# Altium PCB LT5512.PcbDoc
Units mil, origin at the board's own origin, x right, y up, seen from the top; angles counter-clockwise.
Board outline 1422 x 893 mil, 4 copper layers (Top Layer, Layer 1, Layer 2, Bottom Layer), stack 23.756 mil thick; 21 components, 14 nets, 78 pads, 99 vias.
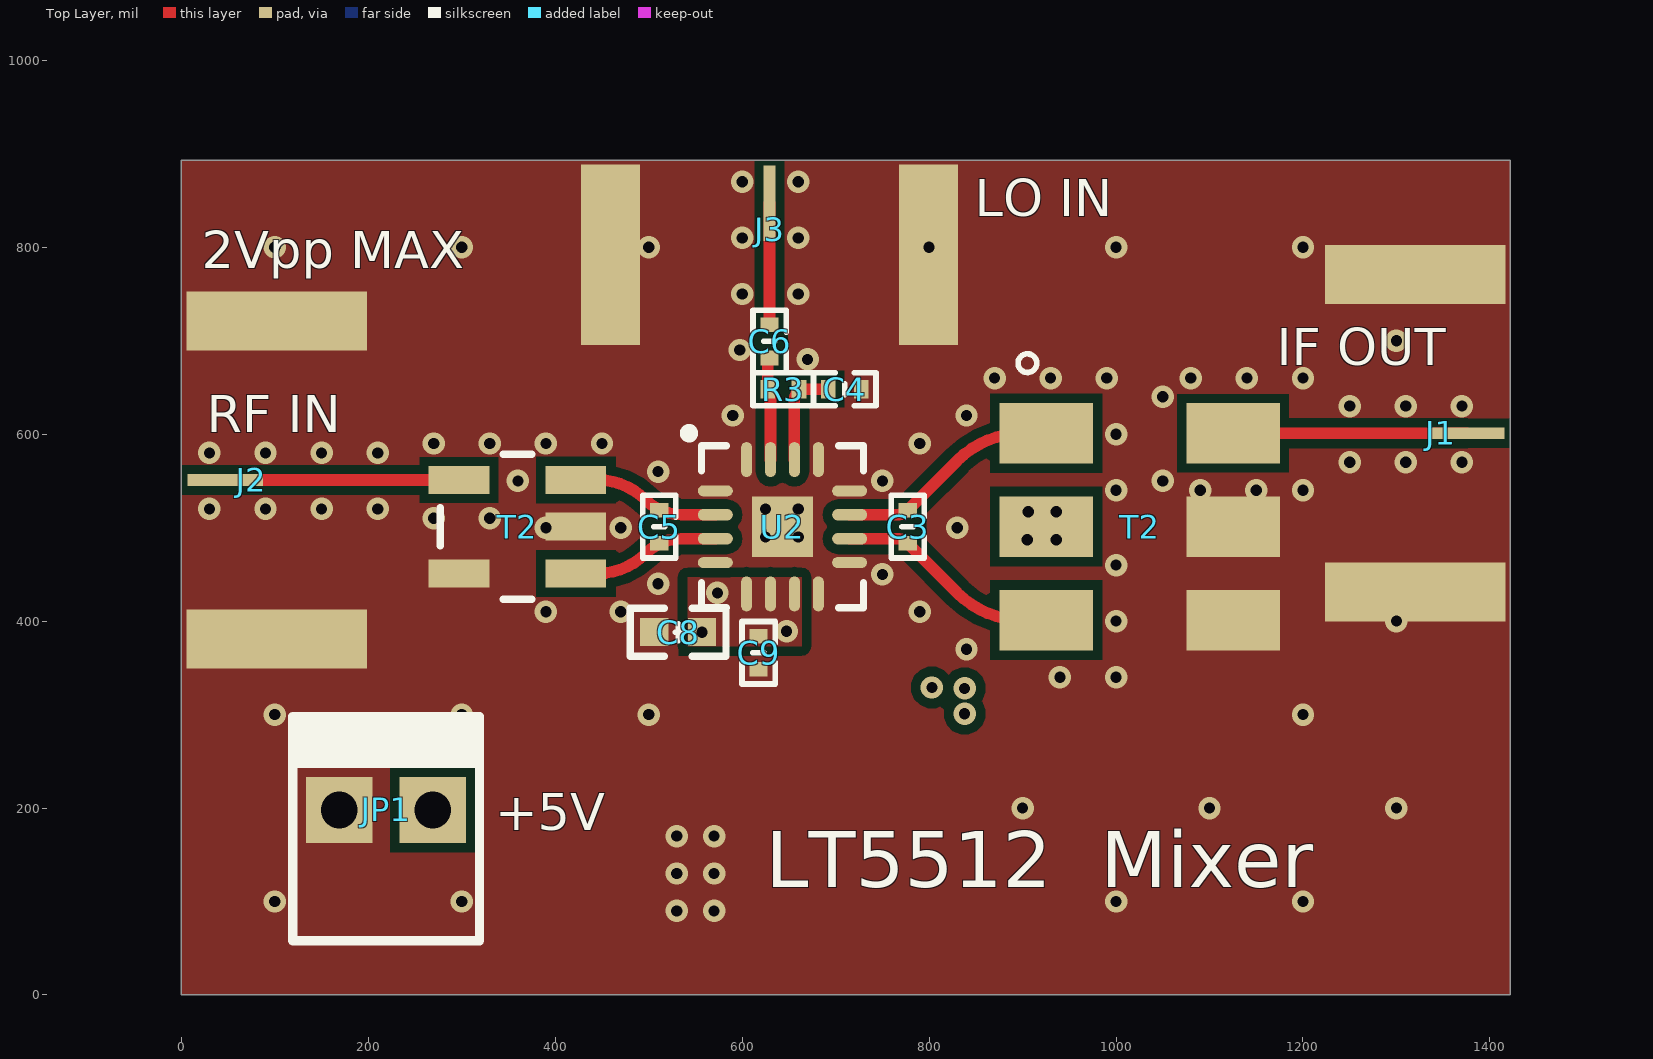
[diagram p0: Top Layer view]
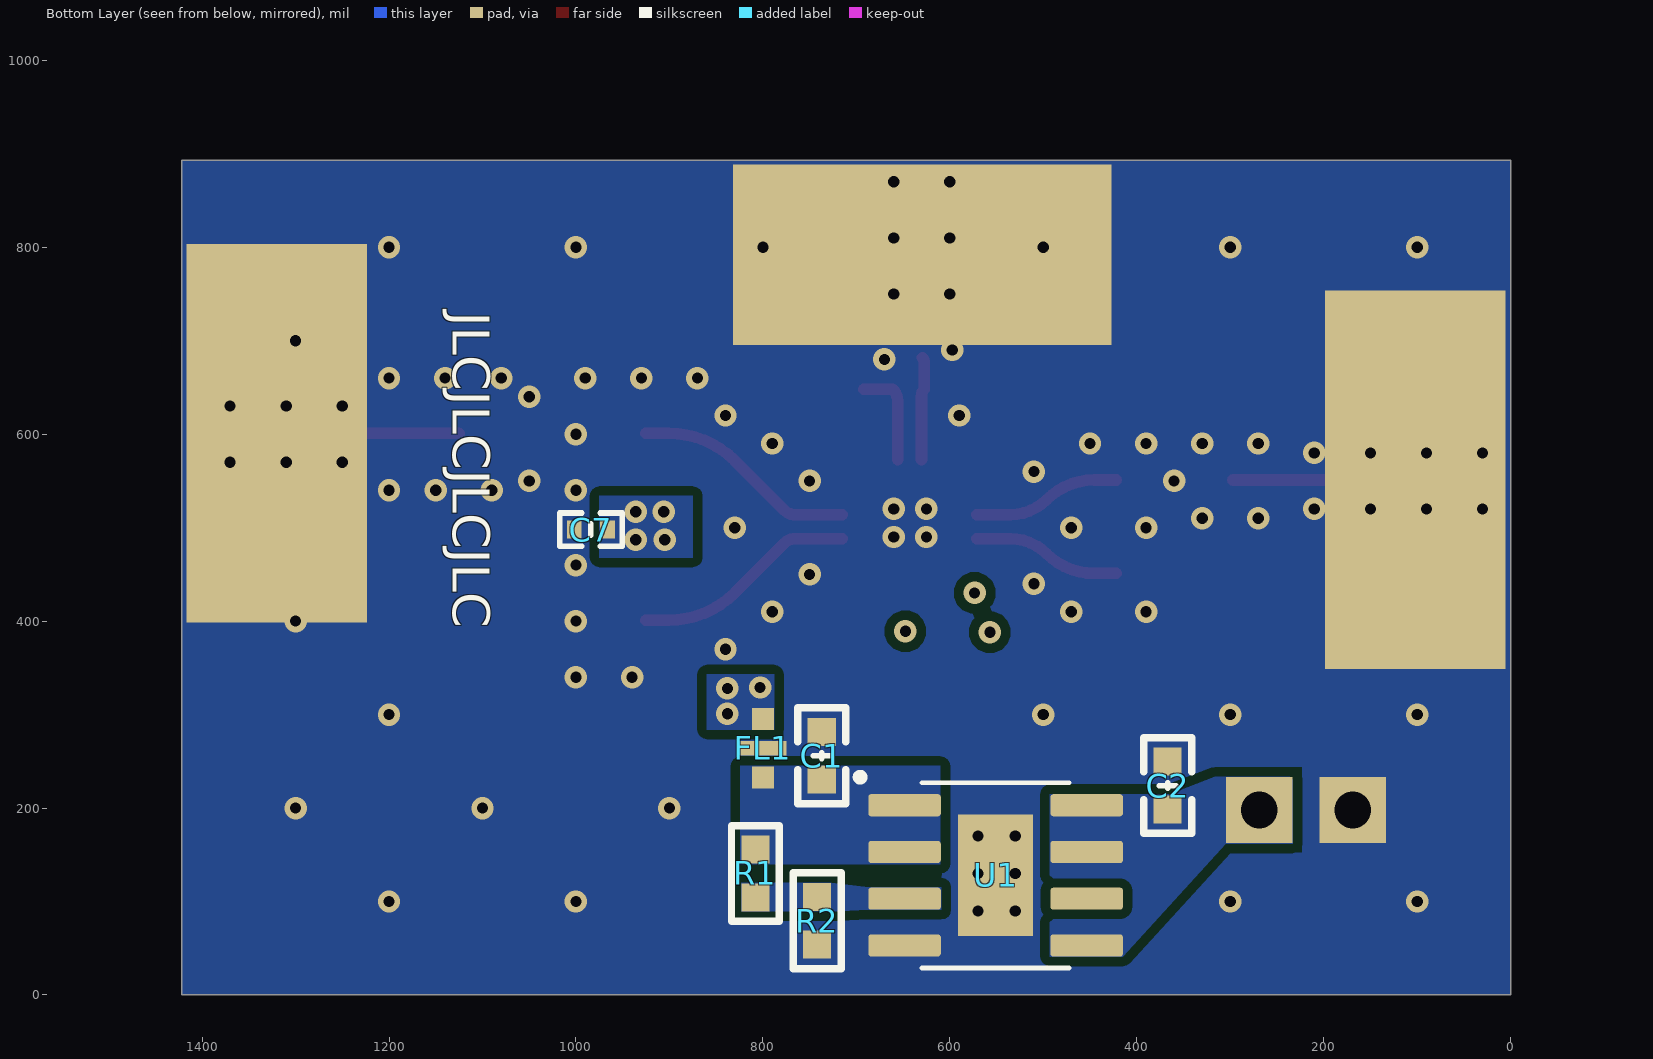
[diagram p1: Bottom Layer view, seen from below]
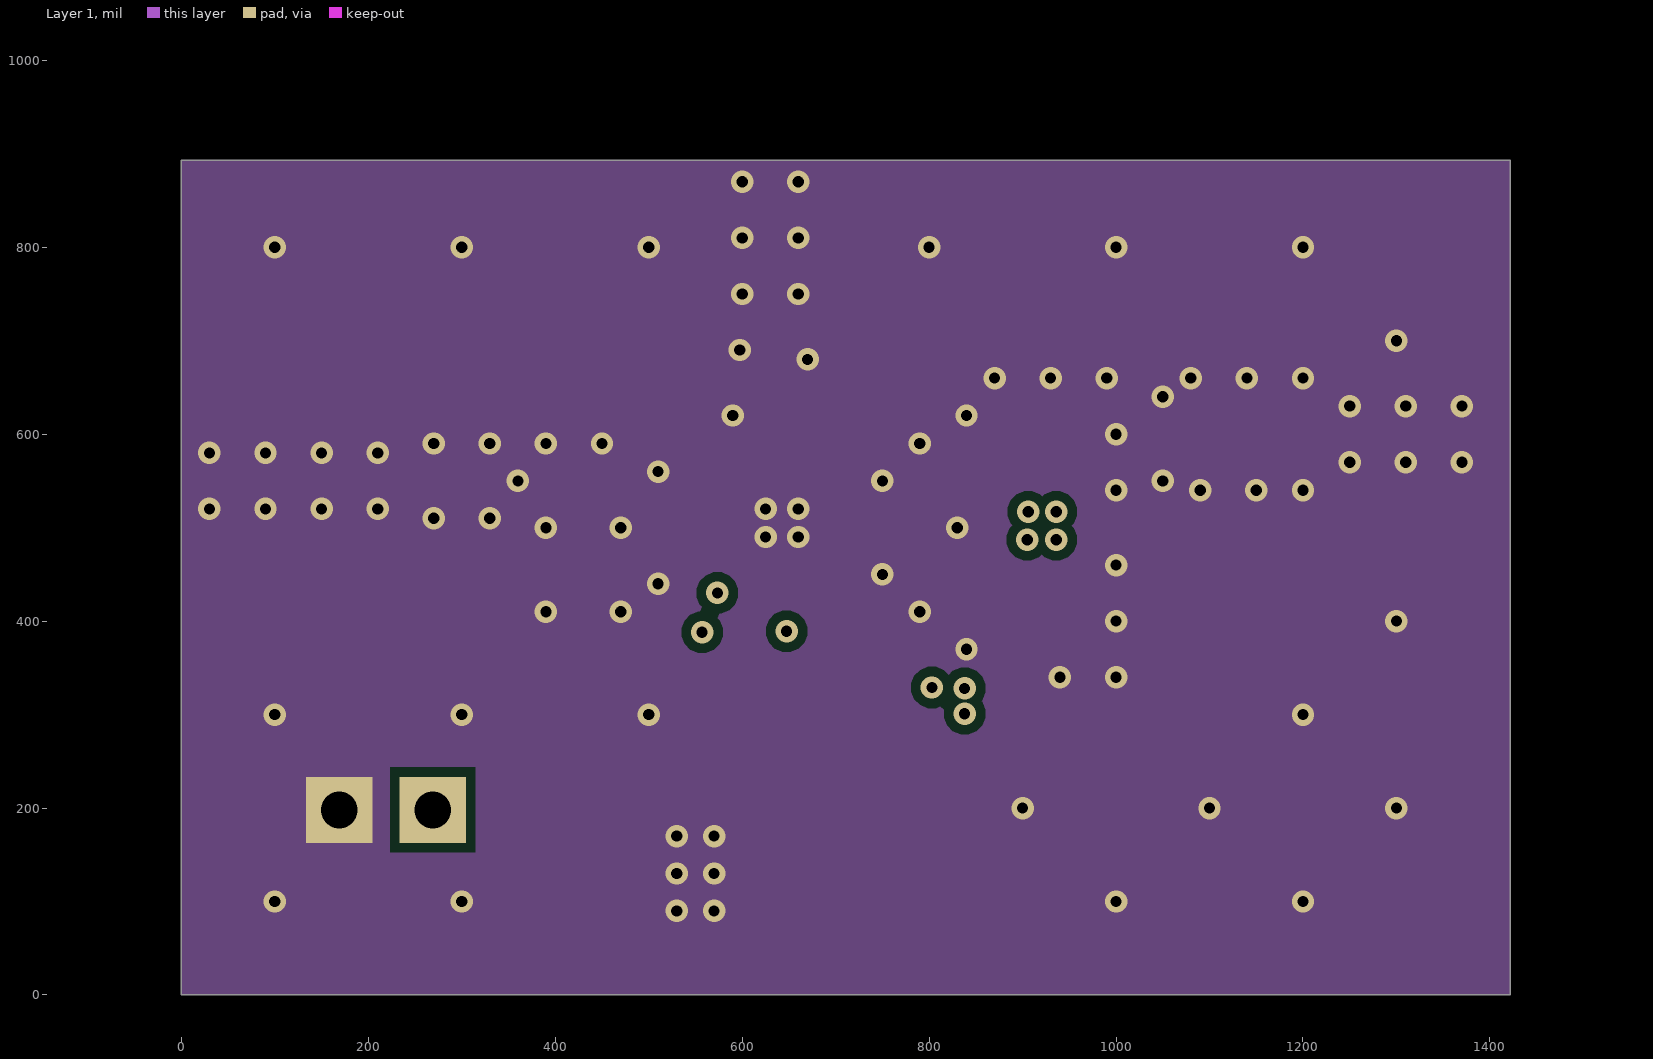
[diagram p2: Layer 1]
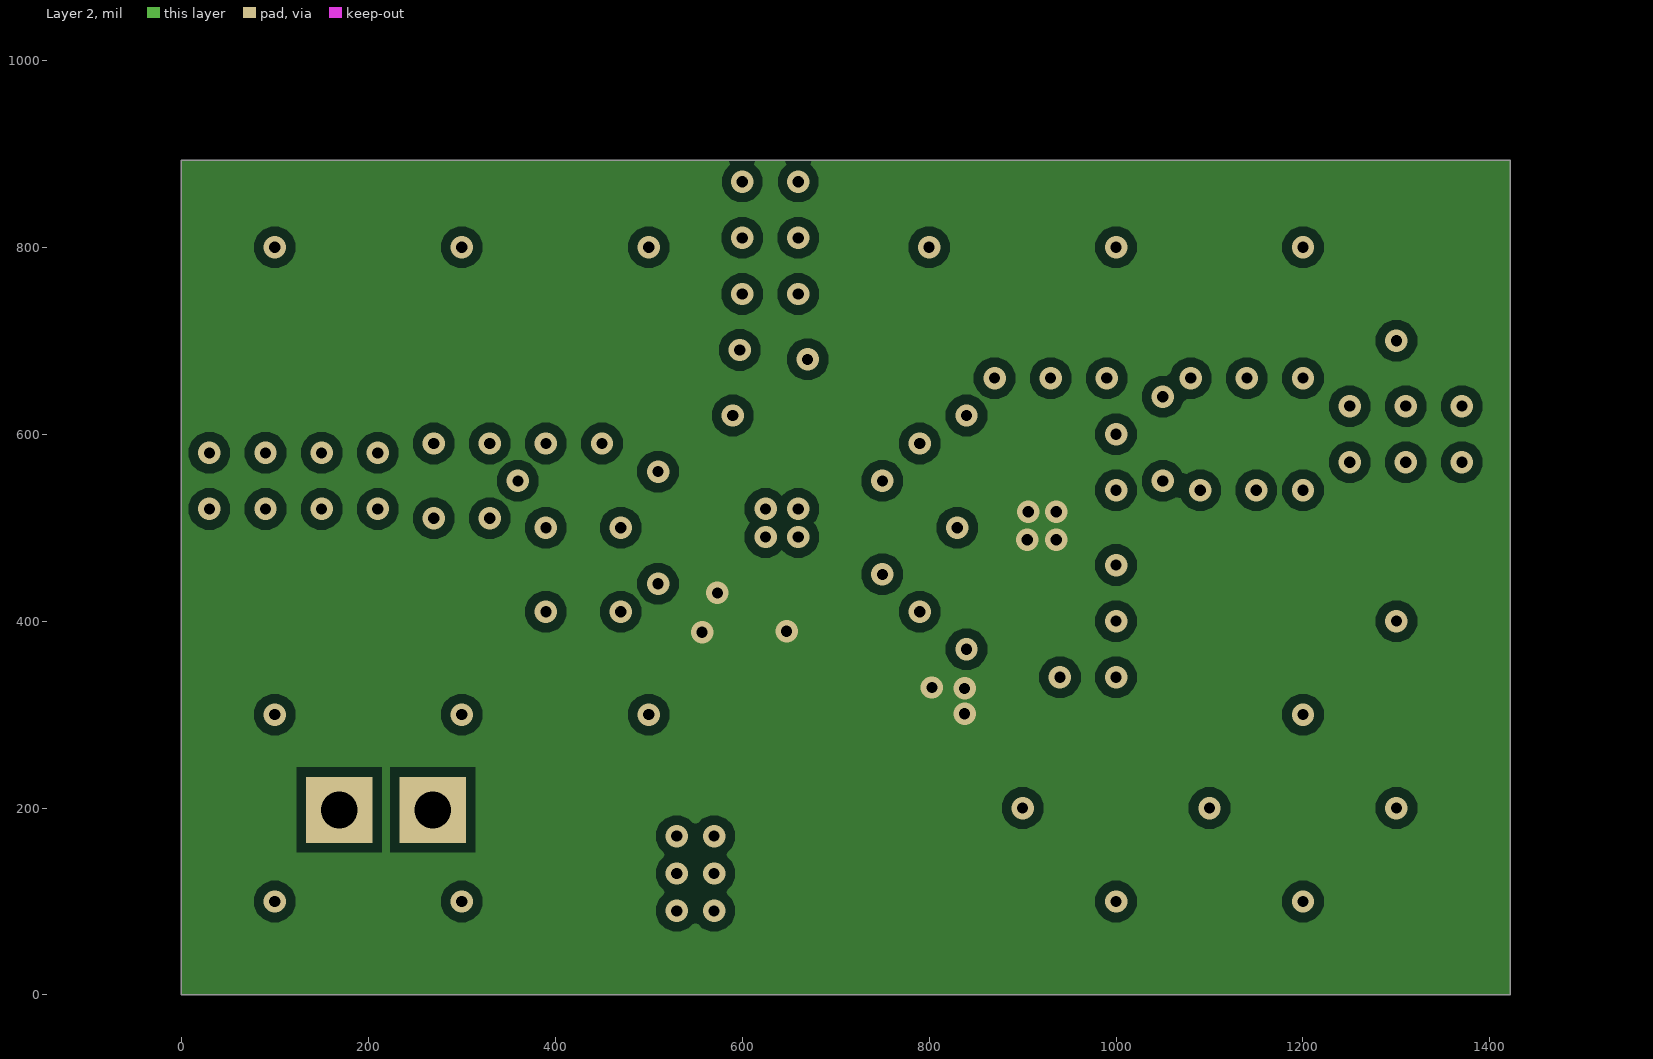
[diagram p3: Layer 2]
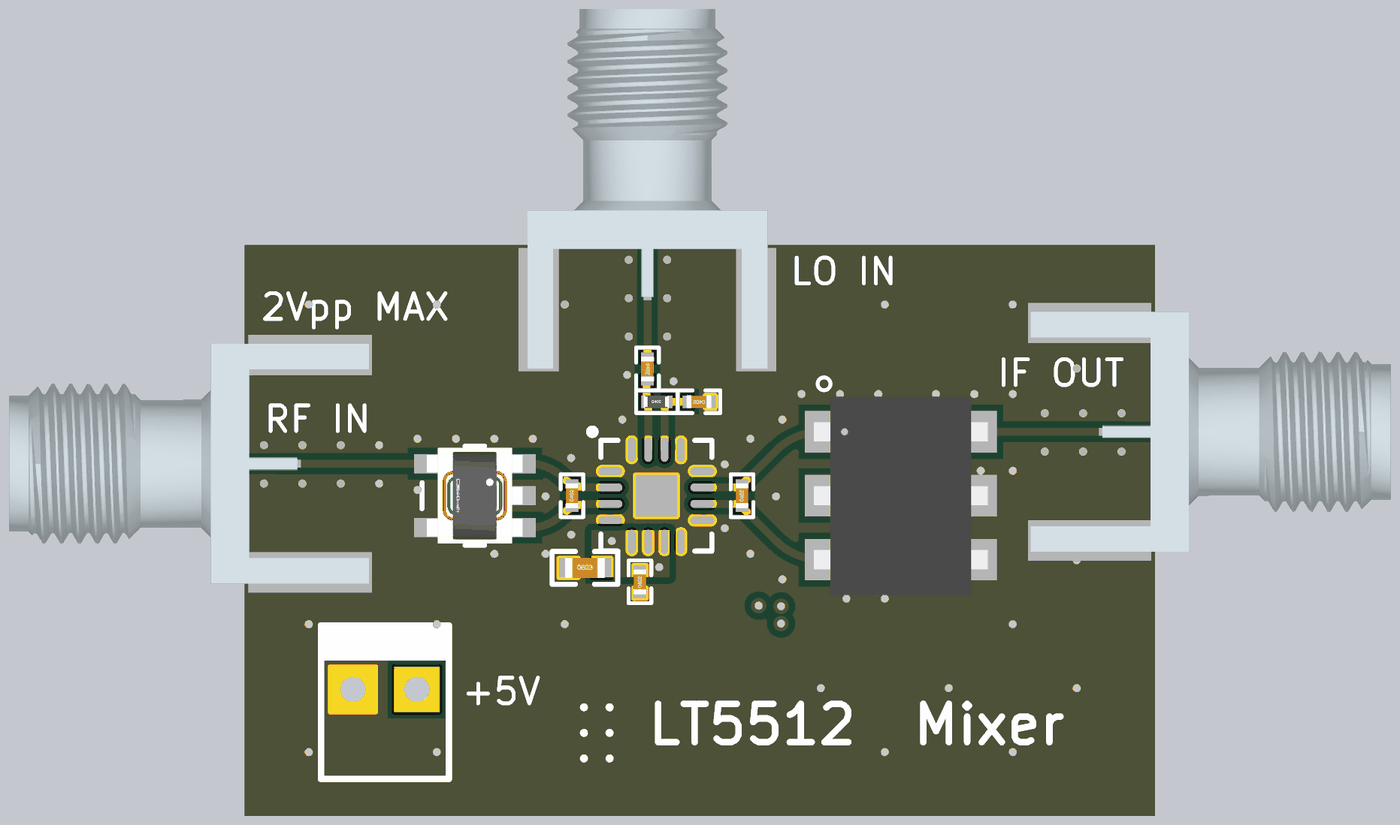
[diagram p4: 3D render of the assembled board from above, using the file's embedded part models]
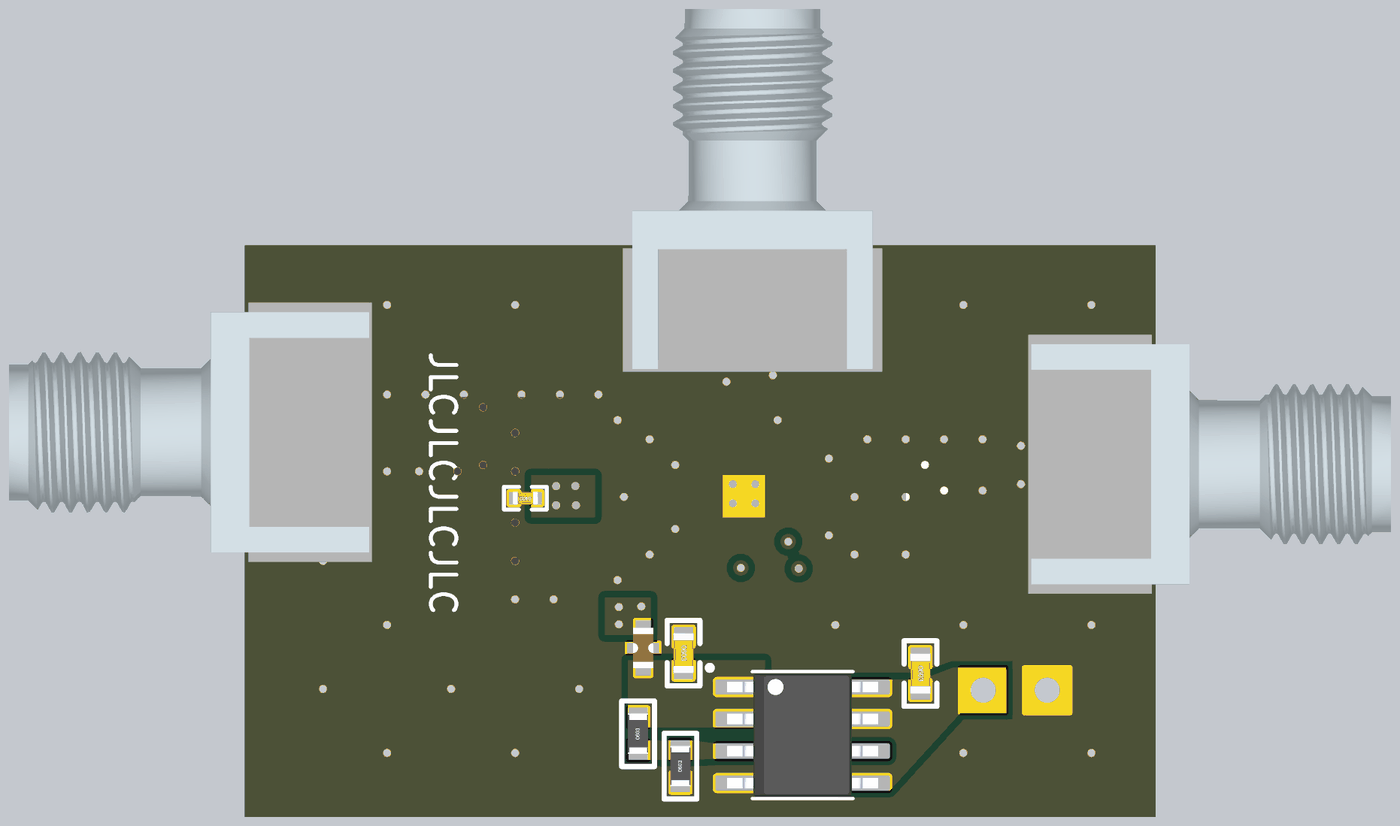
[diagram p5: 3D render of the assembled board from below, using the file's embedded part models]

## Layer stack, top to bottom
Top Solder: solder mask 0.4, Solder Resist, Dk 3.5
Top Layer: signal copper 1.4
Dielectric 2: prepreg 2.8, PP-006, Dk 4.1
Layer 1: signal copper 1.378
Dielectric 1: dielectric 12.6, FR-4, Dk 4.8
Layer 2: signal copper 1.378
Dielectric 3: prepreg 2.8, PP-006, Dk 4.1
Bottom Layer: signal copper 1.4
Bottom Solder: solder mask 0.4, Solder Resist, Dk 3.5

## Board outline
0,0 1422,0 1422,893 0,893

## Design rules (kind name [scope] priority, off if disabled: settings)
Clearance [All] p1: gap=10 ignorepadtopadclearanceinfootprint=TRUE
PlaneConnect [All] p1: planeconnectstyle=Direct reliefexpansion=20 reliefentries=4 reliefconductorwidth=10 reliefairgap=10
PolygonConnect [All] p1: connectstyle=Direct reliefconductorwidth=10 reliefentries=4 polygonreliefangle="90 Angle" airgapwidth=10
RoutingVias [All] p1: holewidth=28 width=50 viastyle="Through Hole" minholewidth=28 minwidth=50 maxholewidth=28 maxwidth=50
SolderMaskExpansion [All] p1: expansion=4 istentingtop=FALSE
Width [All] p1: maxlimit=20 minlimit=9 preferedwidth=10
29 further rules are at their usual default settings.

## Components (designator, comment, footprint, x,y, rotation, side; value= is the part's Value field where it differs from the comment)
C1 "4.7uF" "C 0603_L" 737,256 r270 bottom
C2 "2.2uF" "C 0603_L" 367,224 r270 bottom
C3 "1.8pF" "C 0402_L" 777,501 r90 top
C4 "10nF" "C 0402_L" 709.71,648 r180 top
C5 "39pF" "C 0402_L" 511.3,501 r90 top
C6 "10nF" "C 0402_L" 629.26,699.29 r270 top
C7 "100nF" "C 0402_L" 984,498 r0 bottom
C8 "1uF" "C 0603_L" 531.5,388.15 r0 top
C9 "10nF" "C 0402_L" 617.5,366.15 r90 top
FL1 "NFM18CC223R1C3D" FIL_NFM18CC223R1C3D 800,264 r90 bottom
J1 "132414" CONN_132414_AMP 1520.15,601 r270 top
J2 "132414" CONN_132414_AMP -98,551 r90 top
J3 "132414" CONN_132414_AMP 629.26,992.01 r0 top
JP1 "HDR-1X2" KF2510-LI-2P 219,198 r0 top
R1 "51K" "R 0603_L" 808,130 r90 bottom
R2 "10K" "R 0603_L" 741.87,79.39 r90 bottom
R3 "100" "R 0402_L" 643.11,647.99 r0 top
T2 "ADT8-1T+" ADT8-1T+ 1030.15,506 r0 top (schematic designator T?)
T2 "TC1-1T" FP-TC1-1-13M+-MFG 359.5,501 r270 top
U1 "MP20051DQ-LF-Z" SOIC127P600X170-9N 551,128 r180 bottom
U2 "LT5512EUF#PBF" LT-UF-16_L 643.11,501 r0 top (schematic designator U?)

## Footprints (in the part's own frame and the unit in brackets; to place one, negate y for a bottom-side part, rotate by r counter-clockwise, add the part's x,y. Pads: shape width x height; smd on the part's side, far side on the other; paste and mask are expansions set on the pad)
ADT8-1T+ [mil]
  rect 100x65 smd mask+0: 1(-105,95) 2(-105,-5) 3(-105,-105) 4(95,-105) 5(95,-5) 6(95,95)
  silkscreen extent -135,160 -115,180, body extent -141,-160 131,150, height 206
"C 0402_L" [mm] "无极性贴片电容"
  rect 0.4x0.5 smd: 1(-0.45,0) 2(0.45,0)
  silkscreen extent -0.85,-0.45 0.85,0.45, body extent -0.5,-0.26 0.5,0.26, height 0.53
"C 0603_L" [mil] "无极性贴片电容"
  rect 30x30 smd: 1(-25.59,0) 2(25.59,0)
  silkscreen extent -51,-26 51,26, body extent -31,-16 31,16, height 32
CONN_132414_AMP [mil]
  rect 12.36x81 smd paste+0 mask+0: 1(0,-145)
  rect 63x193 smd mask+0: 2(-170,-200) 3(170,-200)
  rect 405x193 smd far side mask+0: 4(0,-200)
  body extent -188,-292 188,270, height 162
FIL_NFM18CC223R1C3D [mm]
  rect 0.6x0.6 smd: 1(-0.8,0) 3(0.8,0)
  rect 0.4x1.27 smd: 2(0,0)
  body extent -0.8,-0.4 0.8,0.4, height 0.7
FP-TC1-1-13M+-MFG [mil]
  rect 30x65 smd paste+0 mask+0: 1(-50,62.5) 2(0,62.5) 3(50,62.5) 4(50,-62.5) 6(-50,-62.5)
  silkscreen extent -78,-83 78,15, body extent -81,-99 81,99, height 10
KF2510-LI-2P [mm] "接插件/2A"
  rect 1.8x1.8 hole 1: 1(-1.27,0) 2(1.27,0)
  silkscreen extent -2.59,-3.56 2.54,2.54, body extent -2.54,-3.5 2.54,2.4, height 11.05
LT-UF-16_L [mm] "QFN, 16-Leads, Body 4.1x4.1mm, Pitch 0.65mm, Thermal Pad 2.15x2.15mm, IPC High Density"
  oval 0.95x0.3 smd: 1(-1.825,0.975) 4(-1.825,-0.975) 9(1.825,-0.975) 12(1.825,0.975)
  oval 0.95x0.314 smd: 2(-1.825,0.325) 3(-1.825,-0.325) 10(1.825,-0.325) 11(1.825,0.325)
  oval 0.3x0.95 smd: 5(-0.975,-1.825) 6(-0.325,-1.825) 7(0.325,-1.825) 8(0.975,-1.825) 13(0.975,1.825) 14(0.325,1.825) 15(-0.325,1.825) 16(-0.975,1.825)
  rect 1.651x1.651 smd: 17(0,0)
  silkscreen extent -2.66,-2.2 2.2,2.66, body extent -2.05,-2.05 2.05,2.05, height 0.8
"R 0402_L" [mm] "1/16W贴片电阻 https://item.taobao.com/item.htm?ft=t&id=613637044352"
  rect 0.4x0.5 smd: 1(-0.4,0) 2(0.45,0)
  silkscreen extent -0.8,-0.45 0.85,0.45, body extent -0.5,-0.25 0.5,0.25, height 0.3
"R 0603_L" [mil] "1/10W贴片电阻 https://item.taobao.com/item.htm?ft=t&id=613637044352"
  rect 30x30 smd: 1(-25.59,0) 2(25.59,0)
  silkscreen extent -51,-26 51,26, body extent -31,-16 31,16, height 16
SOIC127P600X170-9N [mm]
  rrect25% 1.97x0.6 smd: 1(-2.475,1.905) 2(-2.475,0.635) 3(-2.475,-0.635) 4(-2.475,-1.905) 5(2.475,-1.905) 6(2.475,-0.635) 7(2.475,0.635) 8(2.475,1.905)
  rect 2.032x3.3 smd paste-3: 9(0,0)
  silkscreen extent -3.78,-2.52 2,2.77, body extent -3,-2.45 3,2.45, height 1.7

## Part data
C1 C2 C3 C4 C5 C6 C7 C8 C9: library part C, "贴片电容", BOM名称=贴片电容, 下单链接=https://item.taobao.com/item.htm?ft=t&id=613637044352, 淘宝ID=小糖豆的小窝窝
FL1: "SMD Capacitor with Capacitance: 22000pF Tol. 20%. Rated Voltage: 16Vdc", Package=NONSTANDARD, Availability="In Stock", Check_prices=https://www.snapeda.com/parts/NFM18CC223R1C3D/Murata/view-part/?ref=eda, MF=Murata, MP=NFM18CC223R1C3D, Price=None, Purchase-URL=https://pricing.snapeda.com/search/part/NFM18CC223R1C3D/?ref=eda, SnapEDA_Link=https://www.snapeda.com/parts/NFM18CC223R1C3D/Murata/view-part/?ref=snap
J1 J2 J3: "No Description Available", Mfr_Name="Amphenol ICC", Copyright="Copyright (C) 2022 Ultra Librarian. All rights reserved.", Manufacturer_Part_Number=132414, RefDes=RefDes, Type=DEV
JP1: library part "Header 2", "2P接插件", BOM名称=2P接插件, 下单链接=https://item.taobao.com/item.htm?ft=t&id=613637044352, 淘宝ID=小糖豆的小窝窝
R1 R2 R3: library part R, "贴片电阻", BOM名称=贴片电阻, 下单链接=https://item.taobao.com/item.htm?ft=t&id=613637044352, 淘宝ID=小糖豆的小窝窝
T2: library part CMP-00025-00008-6, "RF Transformer, 50 ohm, 8.0: 1, 0.10-130 MHz, SMT", RoHS Compliant=Yes
T2: library part CMP-00025-00004-3, "RF Transformer 1: 1 5 Terminal SMD", RoHS Compliant=No
U1: "Low Noise, High PSRR, 1A Linear Regulator"
U2: library part LT5512EUF, "High Signal Level Active Mixer, 4.5 to 5.25 V, -40 to 85 degC, 16-Pin QFN (UF), RoHS, Tube", Frequency="1000 Hz", Generic Part Number=LT5512, Supply Voltage Max="5.25 V", Supply Voltage Min="4.5 V", Temperature Max="85 degC", Temperature Min="-40 degC", Code_JEDEC=MO-220, ComponentLink1Description="Manufacturer URL", ComponentLink1URL=http://www.linear.com/, ComponentLink2Description=Datasheet, ComponentLink2URL=http://cds.linear.com/docs/en/datasheet/5512fa.pdf, ComponentLink3Description="Package Specification", ComponentLink3URL=http://cds.linear.com/docs/en/packaging/QFN_16_05-08-1692.pdf, DatasheetVersion="Rev. A", Mounting Technology="Surface Mount", PackageDescription="16-Pin Plastic Quad Flat No-lead Package, Body 4 x 4 mm, Pitch 0.65 mm", PackageVersion=06/2010, Packing=Tube, PartNumber=LT5512EUF#PBF, RoHS=TRUE

## Via types
v1: diameter 24, hole 12, Top Layer to Bottom Layer, tented both sides, 99 vias

## Nets (pads, with @x,y where several pads share a name; then routed paths per layer and width w, separated by ;. In a path a pad name is that pad's centre, name@x,y a point inside that pad or via, vN(x,y) a via of type N, cw(c..) or ccw(c..) an arc to the next point about the centre after c; other vN are vias at no path point)
+4.88V: C7.1 C8.2 C9.2 FL1.3 T2.2@925.15,501 U2.5 U2.6 U2.7
  other v1: 838,301 838,328 803,329 557.09,388.15 647.5,389.15 573.5,430.15 905,487 936,487 906,517 936,517
+4.88V_RAW: C1.2 FL1.1 R1.2 U1.1 U1.2
+5: C2.2 JP1.2 U1.5 U1.7 U1.8
GND: C1.1 C2.1 C4.1 C7.2 C8.1 C9.1 FL1.2 J1.2 J1.3 J1.4 J2.2 J2.3 J2.4 J3.2 J3.3 J3.4 JP1.1 R2.1 T2.2@422,501 T2.4 T2.5 U1.4 U1.9 U2.1 U2.4 U2.8 U2.9 U2.12 U2.13 U2.16 U2.17
  other v1: 530,90 570,90 100,100 300,100 1000,100 1200,100 530,130 570,130 530,170 570,170 900,200 1100,200 1300,200 100,300 300,300 500,300 1200,300 940,340 1000,340 840,370 1000,400 1300,400 390,410 470,410 790,410 510,440 750,450 1000,460 625,490 660,490 390,500 470,500 830,500 270,510 330,510 30,520 90,520 150,520 210,520 625,520 660,520 1000,540 1090,540 1150,540 1200,540 360,550 750,550 1050,550 510,560 1250,570 1310,570 1370,570 30,580 90,580 150,580 210,580 270,590 330,590 390,590 450,590 790,590 1000,600 590,620 840,620 1250,630 1310,630 1370,630 1050,640 870,660 930,660 990,660 1080,660 1140,660 1200,660 670,680 597.42,690.07 1300,700 600,750 660,750 100,800 300,800 500,800 800,800 1000,800 1200,800 600,810 660,810 600,870 660,870
IF_N: C3.1 T2.3@925.15,401 U2.10 | length 241.3
  Top Layer w12.36: U2.10 765.12,488.2 cw(c765.12,471.4) C3.1 829.99,430.29 ccw(c900.7,501) 900.7,401 T2.3@925.15,401
IF_P: C3.2 T2.1@925.15,601 U2.11 | length 241.3
  Top Layer w12.36: U2.11 765.13,513.79 ccw(c765.13,530.59) C3.2 830,571.71 cw(c900.71,501) 900.71,601 T2.1@925.15,601
NetC4_2: C4.2 R3.2 U2.14 | length 107.6
  Top Layer w12.36: U2.14 655.91,636.11 cw(c672.7,636.11) R3.2 C4.2
NetC6_1: C6.1 J3.1 | length 130
  Top Layer w12.36: C6.1 J3.1
NetC6_2: C6.2 R3.1 U2.15 | length 110
  Top Layer w12.36: C6.2 ccw(c633.82,677.01) 627.36,677.01 R3.1 cw(c620.23,640.85) 630.32,640.85 U2.15
NetJ1_1: J1.1 T2.6@1125.15,601 | length 250
  Top Layer w12.36: T2.6@1125.15,601 J1.1
NetJ2_1: J2.1 T2.6@297,551 | length 250
  Top Layer w12.36: J2.1 T2.6@297,551
NetR1_1: R1.1 R2.2 U1.3
RF_N: C5.1 T2.3@422,451 U2.3 | length 159.2
  Top Layer w12.36: T2.3@422,451 445.44,451 ccw(c445.44,523.21) 496.5,472.15 cw(c535.26,433.39) 535.26,488.2 U2.3
RF_P: C5.2 T2.1@422,551 U2.2 | length 159.2
  Top Layer w12.36: T2.1@422,551 445.44,551 cw(c445.44,478.79) 496.5,529.85 ccw(c535.26,568.61) 535.26,513.79 U2.2
pads on no net: U1.6

## Polygon pours and split planes (outlines as drawn)
GND on Bottom Layer "NONET_L-01_P-001" (solid, remove dead copper, pour order 7): 0,893 1422,893 1422,0 0,0
+4.88V on Bottom Layer "NONET_L-01_P-001" (solid, remove dead copper, pour order 5): 875,534 875,468 975,468 975,534
+4.88V on Bottom Layer "NONET_L-01_P-001" (solid, remove dead copper, pour order 3): 788,284 860,284 860,343 788,343
+4.88V_RAW on Bottom Layer "NONET_L-01_P-001" (solid, remove dead copper, pour order 2): 610,245 610,140 824,140 824,245
NetR1_1 on Bottom Layer "NONET_L-01_P-001" (solid, remove dead copper, pour order 1): 823,120 727,120 687,115 609,115 609,91 687,91 718.55,89.42 823,89.42
+5 on Bottom Layer "NONET_L-01_P-001" (solid, remove dead copper, pour order 0): 316.42,233.42 233,233.66 233,162 304.66,162 415,41 493,41 493,215 415,215 364.89,215
GND on Top Layer "NONET_L-01_P-001" (solid, remove dead copper, pour order 6): 0,893 1422,893 1422,0 0,0
+4.88V on Top Layer "NONET_L-01_P-001" (solid, remove dead copper, pour order 4): 541.5,373.15 541.5,447.15 663.5,447.15 663.5,373.15
GND on Layer 1 "NONET_L-01_P-001" (solid, remove dead copper, pour order 8): 0,893 1422,893 1422,0 0,0
+4.88V on Layer 2 "NONET_L-01_P-001" (solid, remove dead copper, pour order 10): 0,893 1422,893 1422,0 0,0
no net on Bottom Solder "NONET_L-01_P-001" (solid): 610,534 610,468 676,468 676,534

## Silkscreen, mask and mechanical layers (free items; w line width, h text height)
Top Overlay:
  text "LO IN" at 849,833 h40
  text "2Vpp MAX" at 22,777.33 h40
  text "IF OUT" at 1172,674 h40
  text "RF IN" at 27,602 h40
  text "+5V" at 336,176 h40
  text "LT5512  Mixer" at 625,115 h60
Bottom Overlay:
  text "JLCJLCJLCJLC" at 1132,731 h40 r90
Mechanical 1:
  the board outline again, w6